# EAGLE board ArduinoConnector-P (EAGLE 6.1)
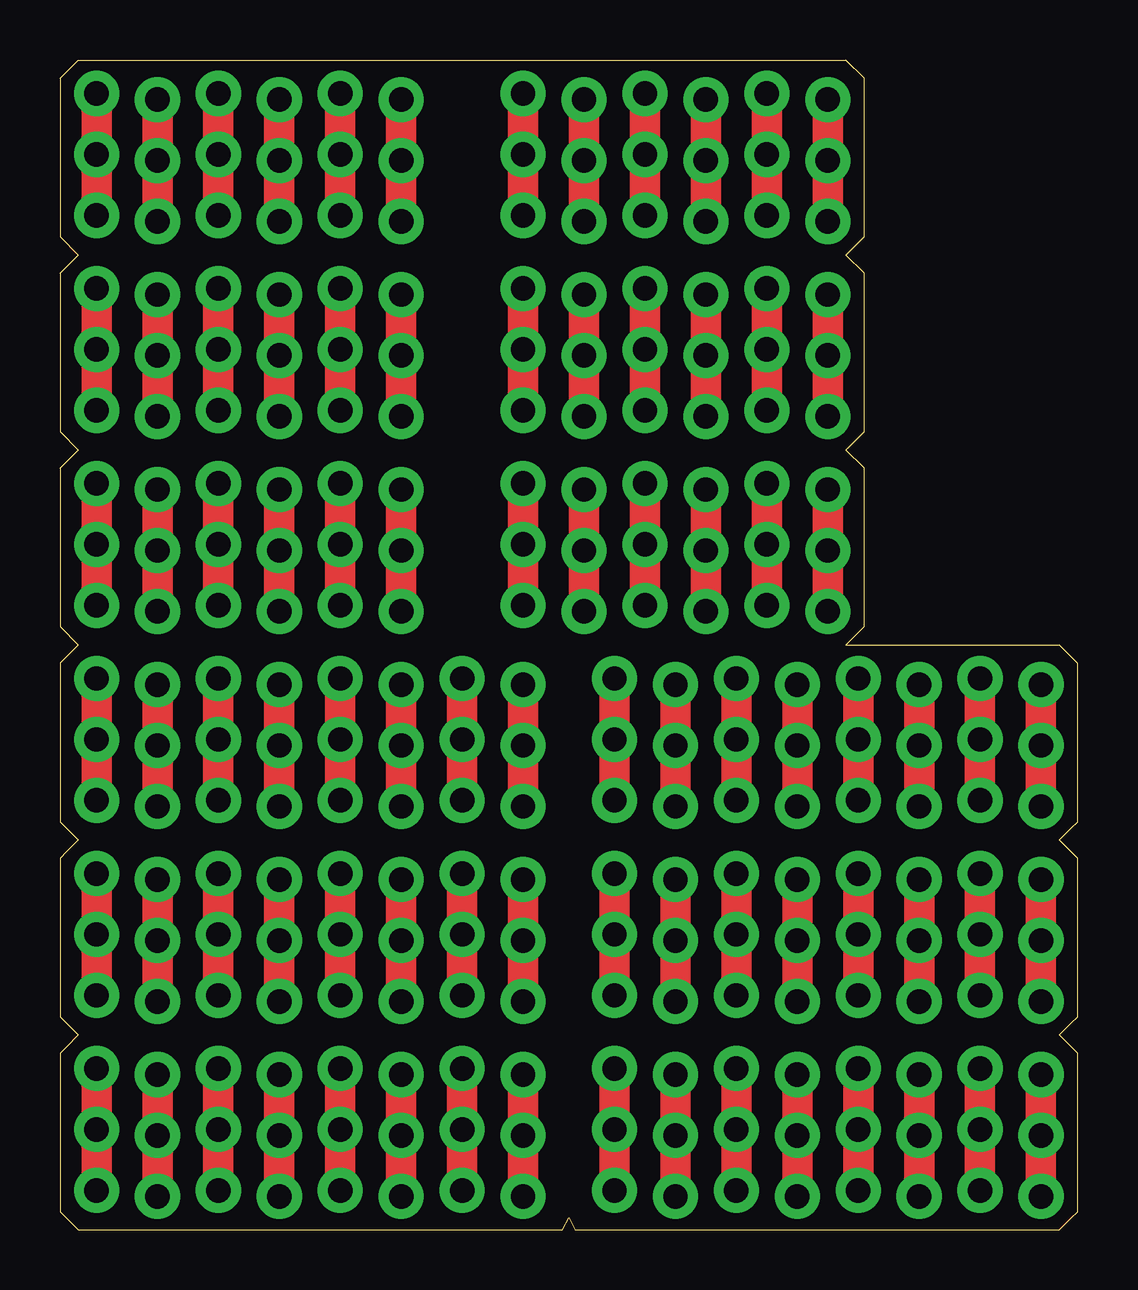
[diagram p0: board, top side]
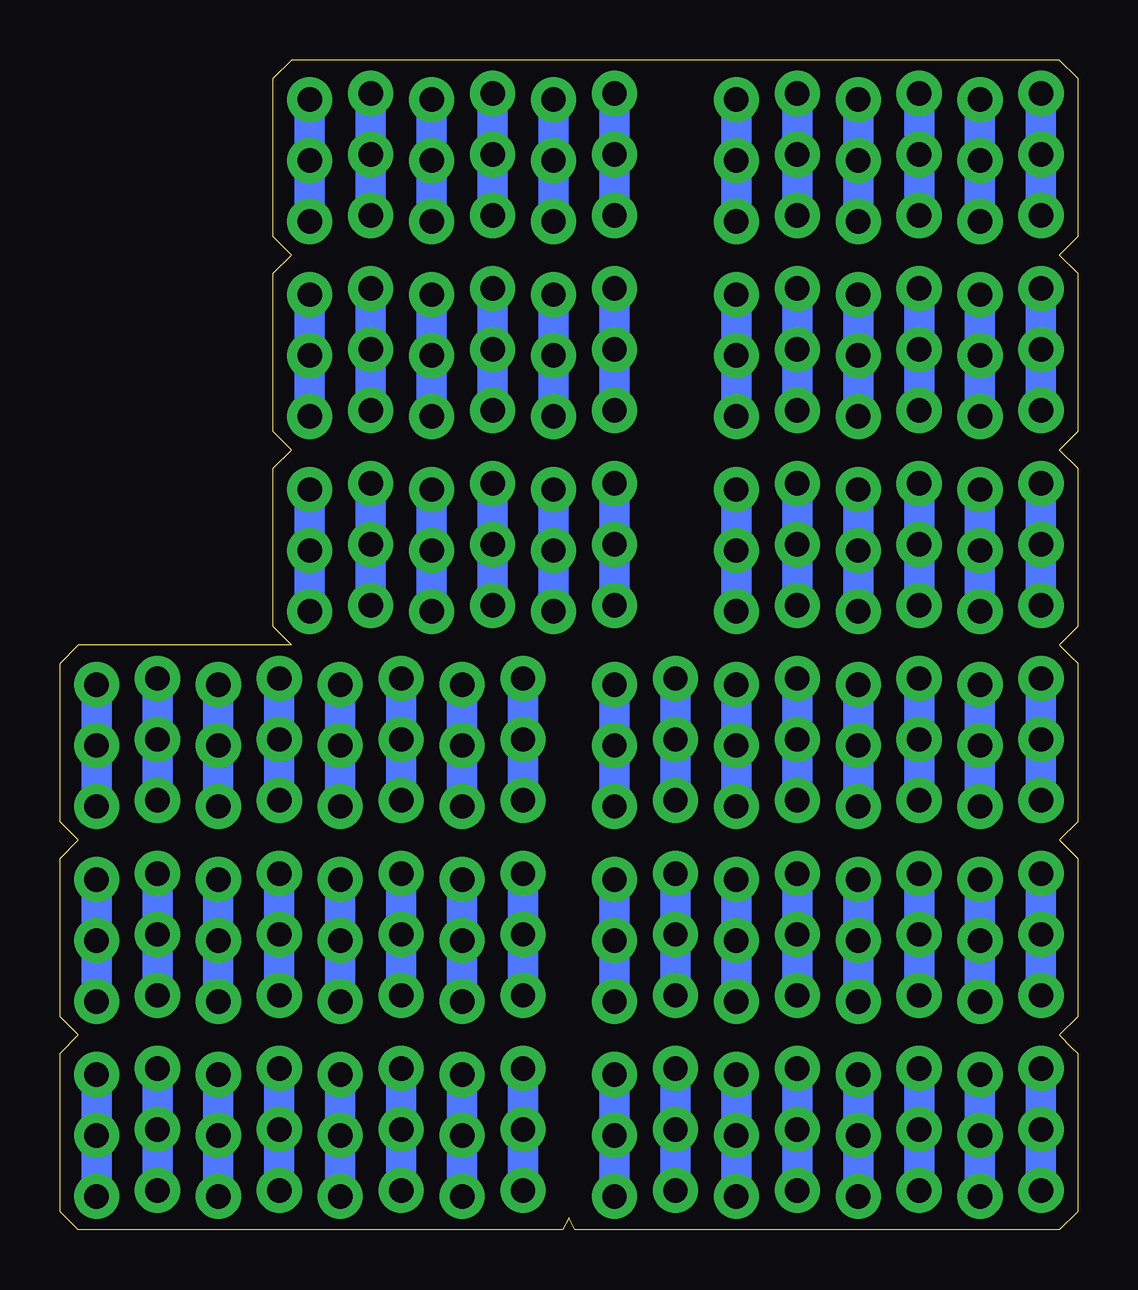
[diagram p1: board, bottom side, seen from below]

Size 42.42 x 48.77 mm. Coordinates in mm from the lower left corner, seen from the top.
Outline: 0.76,8.13 0.25,7.62 0,7.37 0,0.76 0.76,0 20.95,0 21.21,0.51 21.46,0 41.66,0 42.16,0.51 42.42,0.76 42.42,7.37 41.66,8.13 42.16,8.64 42.42,8.89 42.42,15.49 41.66,16.26 42.16,16.76 42.42,17.02 42.42,23.62 41.66,24.38 32.77,24.38 33.53,25.15 33.53,31.75 32.77,32.51 33.53,33.27 33.53,39.88 32.77,40.64 33.53,41.4 33.53,48.01 32.77,48.77 0.76,48.77 0,48.01 0,41.4 0.76,40.64 0,39.88 0,33.27 0.76,32.51 0,31.75 0,25.15 0.76,24.38 0.25,23.88 0,23.62 0,17.02 0.76,16.26 0.25,15.75 0,15.49 0,8.89 0.76,8.13
Copper layers (1*16): Top 0.0356mm / dielectric 1.5011mm / Bottom 0.0356mm
Design rules: minimum track width 9mil, minimum drill 18mil, track to track 9mil, track to pad 9mil, pad to pad 9mil, via to via 9mil, smd to smd 9mil, copper to edge 10mil, drill to drill 9mil, minimum pad ring 10mil, minimum via ring 8mil, stop-mask expansion 4mil, vias tented up to drill 25mil, thermal gap 10mil

## Footprints (pad centres in the part's own frame; a part is rotated, then mirrored left to right if it is on the bottom)
1X08_LOCK_NOSCREEN = drill 1.016 pad 1.88: 1 0,0.127; 2 2.54,-0.127; 3 5.08,0.127; 4 7.62,-0.127; 5 10.16,0.127; 6 12.7,-0.127; 7 15.24,0.127; 8 17.78,-0.127
1X06_LOCK_NOSCREEN = drill 1.016 pad 1.88: 1 0,0.127; 2 2.54,-0.127; 3 5.08,0.127; 4 7.62,-0.127; 5 10.16,0.127; 6 12.7,-0.127

## Placement (x,y rotation side)
JP1  [1X08_LOCK_NOSCREEN]  23.11,6.6 0 top
JP2  [1X08_LOCK_NOSCREEN]  1.52,6.6 0 top
JP3  [1X06_LOCK_NOSCREEN]  1.52,30.99 0 top
JP4  [1X08_LOCK_NOSCREEN]  23.11,4.06 0 top
JP5  [1X08_LOCK_NOSCREEN]  1.52,4.06 0 top
JP6  [1X08_LOCK_NOSCREEN]  1.52,1.52 0 top
JP7  [1X06_LOCK_NOSCREEN]  1.52,28.45 0 top
JP8  [1X06_LOCK_NOSCREEN]  1.52,25.91 0 top
JP9  [1X08_LOCK_NOSCREEN]  23.11,1.52 0 top
JP10  [1X06_LOCK_NOSCREEN]  19.3,30.99 0 top
JP11  [1X06_LOCK_NOSCREEN]  19.3,28.45 0 top
JP12  [1X06_LOCK_NOSCREEN]  19.3,25.91 0 top
JP13  [1X08_LOCK_NOSCREEN]  1.52,14.73 0 top
JP14  [1X06_LOCK_NOSCREEN]  1.52,39.12 0 top
JP15  [1X08_LOCK_NOSCREEN]  1.52,12.19 0 top
JP16  [1X08_LOCK_NOSCREEN]  1.52,9.65 0 top
JP17  [1X06_LOCK_NOSCREEN]  1.52,36.58 0 top
JP18  [1X06_LOCK_NOSCREEN]  1.52,34.04 0 top
JP19  [1X08_LOCK_NOSCREEN]  23.11,14.73 0 top
JP20  [1X08_LOCK_NOSCREEN]  23.11,12.19 0 top
JP21  [1X08_LOCK_NOSCREEN]  23.11,9.65 0 top
JP22  [1X06_LOCK_NOSCREEN]  19.3,39.12 0 top
JP23  [1X06_LOCK_NOSCREEN]  19.3,36.58 0 top
JP24  [1X06_LOCK_NOSCREEN]  19.3,34.04 0 top
JP25  [1X08_LOCK_NOSCREEN]  1.52,22.86 0 top
JP26  [1X06_LOCK_NOSCREEN]  1.52,47.24 0 top
JP27  [1X08_LOCK_NOSCREEN]  1.52,20.32 0 top
JP28  [1X08_LOCK_NOSCREEN]  1.52,17.78 0 top
JP29  [1X06_LOCK_NOSCREEN]  1.52,44.7 0 top
JP30  [1X06_LOCK_NOSCREEN]  1.52,42.16 0 top
JP31  [1X08_LOCK_NOSCREEN]  23.11,22.86 0 top
JP32  [1X08_LOCK_NOSCREEN]  23.11,20.32 0 top
JP33  [1X08_LOCK_NOSCREEN]  23.11,17.78 0 top
JP34  [1X06_LOCK_NOSCREEN]  19.3,47.24 0 top
JP35  [1X06_LOCK_NOSCREEN]  19.3,44.7 0 top
JP36  [1X06_LOCK_NOSCREEN]  19.3,42.16 0 top

## Library data of the parts
JP1-JP36 = 1dah

## Nets
N$1: JP2.1 JP5.1 JP6.1
N$2: JP2.2 JP5.2 JP6.2
N$3: JP2.3 JP5.3 JP6.3
N$4: JP2.4 JP5.4 JP6.4
N$5: JP2.5 JP5.5 JP6.5
N$6: JP2.6 JP5.6 JP6.6
N$7: JP2.7 JP5.7 JP6.7
N$8: JP2.8 JP5.8 JP6.8
N$9: JP3.1 JP7.1 JP8.1
N$10: JP3.2 JP7.2 JP8.2
N$11: JP3.3 JP7.3 JP8.3
N$12: JP3.4 JP7.4 JP8.4
N$13: JP3.5 JP7.5 JP8.5
N$14: JP3.6 JP7.6 JP8.6
N$23: JP1.1 JP4.1 JP9.1
N$24: JP1.2 JP4.2 JP9.2
N$25: JP1.3 JP4.3 JP9.3
N$26: JP1.4 JP4.4 JP9.4
N$27: JP1.5 JP4.5 JP9.5
N$28: JP1.6 JP4.6 JP9.6
N$29: JP1.7 JP4.7 JP9.7
N$30: JP1.8 JP4.8 JP9.8
N$31: JP10.1 JP11.1 JP12.1
N$32: JP10.2 JP11.2 JP12.2
N$33: JP10.3 JP11.3 JP12.3
N$34: JP10.4 JP11.4 JP12.4
N$35: JP10.5 JP11.5 JP12.5
N$36: JP10.6 JP11.6 JP12.6
N$57: JP13.1 JP15.1 JP16.1
N$58: JP13.2 JP15.2 JP16.2
N$59: JP13.3 JP15.3 JP16.3
N$60: JP13.4 JP15.4 JP16.4
N$61: JP13.5 JP15.5 JP16.5
N$62: JP13.6 JP15.6 JP16.6
N$63: JP13.7 JP15.7 JP16.7
N$64: JP13.8 JP15.8 JP16.8
N$65: JP14.1 JP17.1 JP18.1
N$66: JP14.2 JP17.2 JP18.2
N$67: JP14.3 JP17.3 JP18.3
N$68: JP14.4 JP17.4 JP18.4
N$69: JP14.5 JP17.5 JP18.5
N$70: JP14.6 JP17.6 JP18.6
N$79: JP19.1 JP20.1 JP21.1
N$80: JP19.2 JP20.2 JP21.2
N$81: JP19.3 JP20.3 JP21.3
N$82: JP19.4 JP20.4 JP21.4
N$83: JP19.5 JP20.5 JP21.5
N$84: JP19.6 JP20.6 JP21.6
N$85: JP19.7 JP20.7 JP21.7
N$86: JP19.8 JP20.8 JP21.8
N$87: JP22.1 JP23.1 JP24.1
N$88: JP22.2 JP23.2 JP24.2
N$89: JP22.3 JP23.3 JP24.3
N$90: JP22.4 JP23.4 JP24.4
N$91: JP22.5 JP23.5 JP24.5
N$92: JP22.6 JP23.6 JP24.6
N$113: JP25.1 JP27.1 JP28.1
N$114: JP25.2 JP27.2 JP28.2
N$115: JP25.3 JP27.3 JP28.3
N$116: JP25.4 JP27.4 JP28.4
N$117: JP25.5 JP27.5 JP28.5
N$118: JP25.6 JP27.6 JP28.6
N$119: JP25.7 JP27.7 JP28.7
N$120: JP25.8 JP27.8 JP28.8
N$121: JP26.1 JP29.1 JP30.1
N$122: JP26.2 JP29.2 JP30.2
N$123: JP26.3 JP29.3 JP30.3
N$124: JP26.4 JP29.4 JP30.4
N$125: JP26.5 JP29.5 JP30.5
N$126: JP26.6 JP29.6 JP30.6
N$135: JP31.1 JP32.1 JP33.1
N$136: JP31.2 JP32.2 JP33.2
N$137: JP31.3 JP32.3 JP33.3
N$138: JP31.4 JP32.4 JP33.4
N$139: JP31.5 JP32.5 JP33.5
N$140: JP31.6 JP32.6 JP33.6
N$141: JP31.7 JP32.7 JP33.7
N$142: JP31.8 JP32.8 JP33.8
N$143: JP34.1 JP35.1 JP36.1
N$144: JP34.2 JP35.2 JP36.2
N$145: JP34.3 JP35.3 JP36.3
N$146: JP34.4 JP35.4 JP36.4
N$147: JP34.5 JP35.5 JP36.5
N$148: JP34.6 JP35.6 JP36.6

## Tracks (layer width: path | path; a pad name or v marks a point on that pad's centre or on a via)
N$1
  Bottom 1.27: JP2.1 JP5.1 JP6.1
N$2
  Bottom 1.27: JP2.2 JP5.2 JP6.2
N$3
  Bottom 1.27: JP6.3 JP5.3 JP2.3
N$4
  Bottom 1.27: JP2.4 JP5.4 JP6.4
N$5
  Bottom 1.27: JP2.5 JP5.5 JP6.5
N$6
  Bottom 1.27: JP2.6 JP5.6 JP6.6
N$7
  Bottom 1.27: JP2.7 JP5.7 JP6.7
N$8
  Bottom 1.27: JP6.8 JP5.8 JP2.8
N$9
  Top 1.27: JP3.1 JP7.1 JP8.1
N$10
  Top 1.27: JP8.2 JP7.2 JP3.2
N$11
  Top 1.27: JP3.3 JP7.3 JP8.3
N$12
  Top 1.27: JP8.4 JP7.4 JP3.4
N$13
  Top 1.27: JP3.5 JP7.5 JP8.5
N$14
  Top 1.27: JP8.6 JP7.6 JP3.6
N$15
  Top 1.27: 1.52,1.52 1.52,6.6
N$16
  Top 1.27: 4.06,6.6 4.06,1.52
N$17
  Top 1.27: 6.6,6.6 6.6,1.52
N$18
  Top 1.27: 9.14,1.27 9.14,6.6
N$19
  Top 1.27: 11.68,6.6 11.68,1.52
N$20
  Top 1.27: 14.22,6.6 14.22,1.52
N$21
  Top 1.27: 16.76,1.52 16.76,6.86
N$22
  Top 1.27: 19.3,6.6 19.3,1.27
N$23
  Top 1.27: JP9.1 JP4.1 JP1.1
N$24
  Top 1.27: JP1.2 JP4.2 JP9.2
N$25
  Top 1.27: JP9.3 JP4.3 JP1.3
N$26
  Top 1.27: JP1.4 JP4.4 JP9.4
N$27
  Top 1.27: JP9.5 JP4.5 JP1.5
N$28
  Top 1.27: JP1.6 JP4.6 JP9.6
N$29
  Top 1.27: JP9.7 JP4.7 JP1.7
N$30
  Top 1.27: JP1.8 JP4.8 JP9.8
N$31
  Top 1.27: JP10.1 JP11.1 JP12.1
N$32
  Top 1.27: JP10.2 JP11.2 JP12.2
N$33
  Top 1.27: JP10.3 JP11.3 JP12.3
N$34
  Top 1.27: JP10.4 JP11.4 JP12.4
N$35
  Top 1.27: JP12.5 JP11.5 JP10.5
N$36
  Top 1.27: JP10.6 JP11.6 JP12.6
N$37
  Bottom 1.27: 23.11,1.52 23.11,6.6
N$38
  Bottom 1.27: 25.65,6.6 25.65,1.27
N$39
  Bottom 1.27: 28.19,6.86 28.19,1.52
N$40
  Bottom 1.27: 30.73,1.27 30.73,6.6
N$41
  Bottom 1.27: 33.27,6.86 33.27,1.52
N$42
  Bottom 1.27: 35.81,6.6 35.81,1.27
N$43
  Bottom 1.27: 38.35,1.52 38.35,6.6
N$44
  Bottom 1.27: 40.89,6.6 40.89,1.27
N$45
  Bottom 1.27: 1.52,30.99 1.52,25.91
N$46
  Bottom 1.27: 4.06,25.91 4.06,30.99
N$47
  Bottom 1.27: 6.6,30.99 6.6,25.91
N$48
  Bottom 1.27: 9.14,25.91 9.14,30.99
N$49
  Bottom 1.27: 11.68,30.99 11.68,25.91
N$50
  Bottom 1.27: 14.22,25.91 14.22,30.99
N$51
  Bottom 1.27: 19.3,30.99 19.3,25.91
N$52
  Bottom 1.27: 21.84,25.91 21.84,30.99
N$53
  Bottom 1.27: 24.38,30.99 24.38,25.91
N$54
  Bottom 1.27: 26.92,30.99 26.92,25.65
N$55
  Bottom 1.27: 29.46,25.91 29.46,30.99
N$56
  Bottom 1.27: 32,30.99 32,25.65
N$57
  Bottom 1.27: JP13.1 JP15.1 JP16.1
N$58
  Bottom 1.27: JP13.2 JP15.2 JP16.2
N$59
  Bottom 1.27: JP16.3 JP15.3 JP13.3
N$60
  Bottom 1.27: JP13.4 JP15.4 JP16.4
N$61
  Bottom 1.27: JP13.5 JP15.5 JP16.5
N$62
  Bottom 1.27: JP13.6 JP15.6 JP16.6
N$63
  Bottom 1.27: JP13.7 JP15.7 JP16.7
N$64
  Bottom 1.27: JP16.8 JP15.8 JP13.8
N$65
  Top 1.27: JP14.1 JP17.1 JP18.1
N$66
  Top 1.27: JP18.2 JP17.2 JP14.2
N$67
  Top 1.27: JP14.3 JP17.3 JP18.3
N$68
  Top 1.27: JP18.4 JP17.4 JP14.4
N$69
  Top 1.27: JP14.5 JP17.5 JP18.5
N$70
  Top 1.27: JP18.6 JP17.6 JP14.6
N$71
  Top 1.27: 1.52,9.65 1.52,14.73
N$72
  Top 1.27: 4.06,14.73 4.06,9.65
N$73
  Top 1.27: 6.6,14.73 6.6,9.65
N$74
  Top 1.27: 9.14,9.4 9.14,14.73
N$75
  Top 1.27: 11.68,14.73 11.68,9.65
N$76
  Top 1.27: 14.22,14.73 14.22,9.65
N$77
  Top 1.27: 16.76,9.65 16.76,14.99
N$78
  Top 1.27: 19.3,14.73 19.3,9.4
N$79
  Top 1.27: JP21.1 JP20.1 JP19.1
N$80
  Top 1.27: JP19.2 JP20.2 JP21.2
N$81
  Top 1.27: JP21.3 JP20.3 JP19.3
N$82
  Top 1.27: JP19.4 JP20.4 JP21.4
N$83
  Top 1.27: JP21.5 JP20.5 JP19.5
N$84
  Top 1.27: JP19.6 JP20.6 JP21.6
N$85
  Top 1.27: JP21.7 JP20.7 JP19.7
N$86
  Top 1.27: JP19.8 JP20.8 JP21.8
N$87
  Top 1.27: JP22.1 JP23.1 JP24.1
N$88
  Top 1.27: JP22.2 JP23.2 JP24.2
N$89
  Top 1.27: JP22.3 JP23.3 JP24.3
N$90
  Top 1.27: JP22.4 JP23.4 JP24.4
N$91
  Top 1.27: JP24.5 JP23.5 JP22.5
N$92
  Top 1.27: JP22.6 JP23.6 JP24.6
N$93
  Bottom 1.27: 23.11,9.65 23.11,14.73
N$94
  Bottom 1.27: 25.65,14.73 25.65,9.4
N$95
  Bottom 1.27: 28.19,14.99 28.19,9.65
N$96
  Bottom 1.27: 30.73,9.4 30.73,14.73
N$97
  Bottom 1.27: 33.27,14.99 33.27,9.65
N$98
  Bottom 1.27: 35.81,14.73 35.81,9.4
N$99
  Bottom 1.27: 38.35,9.65 38.35,14.73
N$100
  Bottom 1.27: 40.89,14.73 40.89,9.4
N$101
  Bottom 1.27: 1.52,39.12 1.52,34.04
N$102
  Bottom 1.27: 4.06,34.04 4.06,39.12
N$103
  Bottom 1.27: 6.6,39.12 6.6,34.04
N$104
  Bottom 1.27: 9.14,34.04 9.14,39.12
N$105
  Bottom 1.27: 11.68,39.12 11.68,34.04
N$106
  Bottom 1.27: 14.22,34.04 14.22,39.12
N$107
  Bottom 1.27: 19.3,39.12 19.3,34.04
N$108
  Bottom 1.27: 21.84,34.04 21.84,39.12
N$109
  Bottom 1.27: 24.38,39.12 24.38,34.04
N$110
  Bottom 1.27: 26.92,39.12 26.92,33.78
N$111
  Bottom 1.27: 29.46,34.04 29.46,39.12
N$112
  Bottom 1.27: 32,39.12 32,33.78
N$113
  Bottom 1.27: JP25.1 JP27.1 JP28.1
N$114
  Bottom 1.27: JP25.2 JP27.2 JP28.2
N$115
  Bottom 1.27: JP28.3 JP27.3 JP25.3
N$116
  Bottom 1.27: JP25.4 JP27.4 JP28.4
N$117
  Bottom 1.27: JP25.5 JP27.5 JP28.5
N$118
  Bottom 1.27: JP25.6 JP27.6 JP28.6
N$119
  Bottom 1.27: JP25.7 JP27.7 JP28.7
N$120
  Bottom 1.27: JP28.8 JP27.8 JP25.8
N$121
  Top 1.27: JP26.1 JP29.1 JP30.1
N$122
  Top 1.27: JP30.2 JP29.2 JP26.2
N$123
  Top 1.27: JP26.3 JP29.3 JP30.3
N$124
  Top 1.27: JP30.4 JP29.4 JP26.4
N$125
  Top 1.27: JP26.5 JP29.5 JP30.5
N$126
  Top 1.27: JP30.6 JP29.6 JP26.6
N$127
  Top 1.27: 1.52,17.78 1.52,22.86
N$128
  Top 1.27: 4.06,22.86 4.06,17.78
N$129
  Top 1.27: 6.6,22.86 6.6,17.78
N$130
  Top 1.27: 9.14,17.53 9.14,22.86
N$131
  Top 1.27: 11.68,22.86 11.68,17.78
N$132
  Top 1.27: 14.22,22.86 14.22,17.78
N$133
  Top 1.27: 16.76,17.78 16.76,23.11
N$134
  Top 1.27: 19.3,22.86 19.3,17.53
N$135
  Top 1.27: JP33.1 JP32.1 JP31.1
N$136
  Top 1.27: JP31.2 JP32.2 JP33.2
N$137
  Top 1.27: JP33.3 JP32.3 JP31.3
N$138
  Top 1.27: JP31.4 JP32.4 JP33.4
N$139
  Top 1.27: JP33.5 JP32.5 JP31.5
N$140
  Top 1.27: JP31.6 JP32.6 JP33.6
N$141
  Top 1.27: JP33.7 JP32.7 JP31.7
N$142
  Top 1.27: JP31.8 JP32.8 JP33.8
N$143
  Top 1.27: JP34.1 JP35.1 JP36.1
N$144
  Top 1.27: JP34.2 JP35.2 JP36.2
N$145
  Top 1.27: JP34.3 JP35.3 JP36.3
N$146
  Top 1.27: JP34.4 JP35.4 JP36.4
N$147
  Top 1.27: JP36.5 JP35.5 JP34.5
N$148
  Top 1.27: JP34.6 JP35.6 JP36.6
N$149
  Bottom 1.27: 23.11,17.78 23.11,22.86
N$150
  Bottom 1.27: 25.65,22.86 25.65,17.53
N$151
  Bottom 1.27: 28.19,23.11 28.19,17.78
N$152
  Bottom 1.27: 30.73,17.53 30.73,22.86
N$153
  Bottom 1.27: 33.27,23.11 33.27,17.78
N$154
  Bottom 1.27: 35.81,22.86 35.81,17.53
N$155
  Bottom 1.27: 38.35,17.78 38.35,22.86
N$156
  Bottom 1.27: 40.89,22.86 40.89,17.53
N$157
  Bottom 1.27: 1.52,47.24 1.52,42.16
N$158
  Bottom 1.27: 4.06,42.16 4.06,47.24
N$159
  Bottom 1.27: 6.6,47.24 6.6,42.16
N$160
  Bottom 1.27: 9.14,42.16 9.14,47.24
N$161
  Bottom 1.27: 11.68,47.24 11.68,42.16
N$162
  Bottom 1.27: 14.22,42.16 14.22,47.24
N$163
  Bottom 1.27: 19.3,47.24 19.3,42.16
N$164
  Bottom 1.27: 21.84,42.16 21.84,47.24
N$165
  Bottom 1.27: 24.38,47.24 24.38,42.16
N$166
  Bottom 1.27: 26.92,47.24 26.92,41.91
N$167
  Bottom 1.27: 29.46,42.16 29.46,47.24
N$168
  Bottom 1.27: 32,47.24 32,41.91